# Altium PCB PCB1.PcbDoc (part 8 of 12)
Units mm, origin at the board's own origin, x right, y up, seen from the top; angles counter-clockwise.
Board outline 100 x 100 mm, 6 copper layers (Top Layer, Int1 (GND), Int2 (Sign), Int3 (Sign), Int4 (PWR), Bottom Layer), stack 1.538 mm thick; 614 components, 712 nets, 3014 pads, 1096 vias.
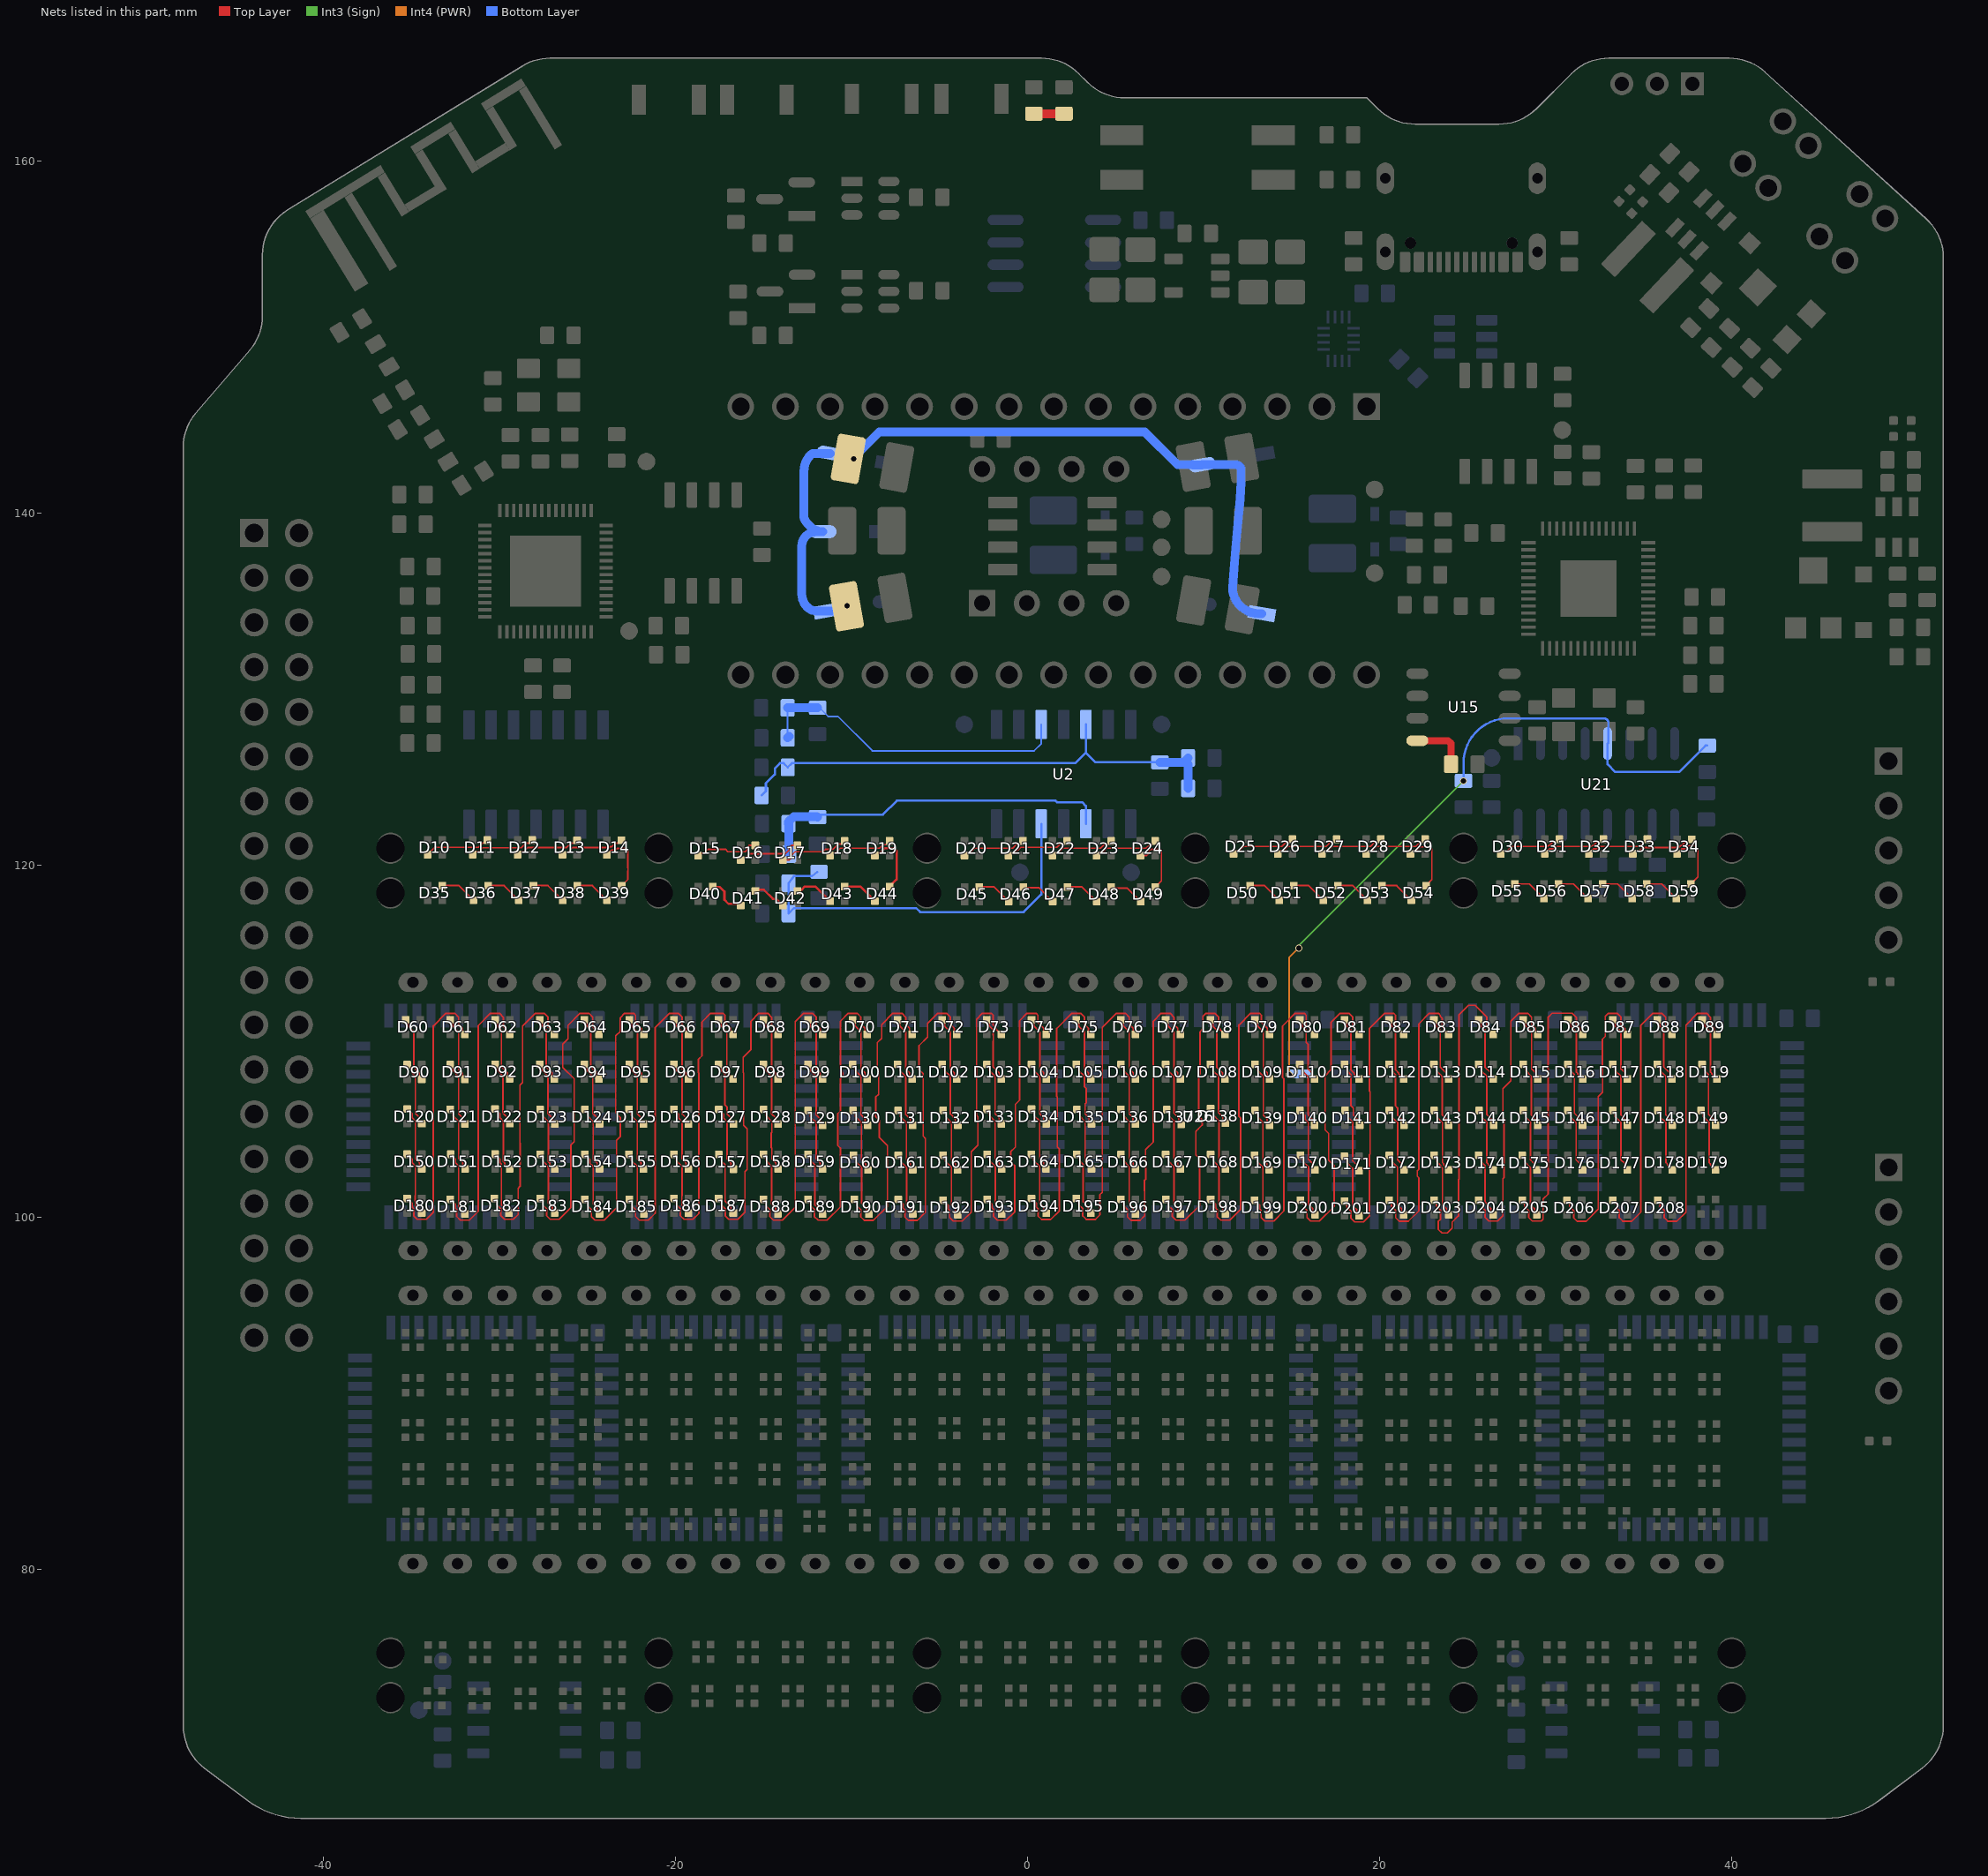
[diagram p11: the nets of this part, all layers, seen from the top]

## Via types
v1: diameter 0.4, hole 0.3, Top Layer to Bottom Layer, tented both sides, 1087 vias
v2: diameter 0.4, hole 0.3, Top Layer to Bottom Layer, 6 vias
v3: diameter 0.4, hole 0.3, Top Layer to Bottom Layer, tented top, 2 vias
v4: diameter 0.6, hole 0.5, Top Layer to Bottom Layer, 1 vias

## Nets (pads, with @x,y where several pads share a name; then routed paths per layer and width w, separated by ;. In a path a pad name is that pad's centre, name@x,y a point inside that pad or via, vN(x,y) a via of type N, cw(c..) or ccw(c..) an arc to the next point about the centre after c; other vN are vias at no path point) (continued)
NetC17_2: C17.2 U15.8 | length 3.2
  Top Layer w0.4: U15.8@22.133,127.087 23.882,127.087 24.045,126.924 C17.2@24.045,125.745
NetC19_2: C19.2 D4.2 D5.1 | length 35.4
  Bottom Layer w0.5: v1(-9.885,143.088) v1@-9.84,143.181 ; 11.805,138.004 12.074,140.825 ; D5.1@13.305,134.308 D5.1@13.121,134.308 ; v1@-9.84,143.181 cw(c-9.39,142.963) -9.744,143.316 ; v1@-9.84,143.181 cw(c-9.39,142.963) -9.744,143.316 ; -9.744,143.316 -8.43,144.63 6.645,144.63 8.508,142.767 9.368,142.767 9.392,142.743 9.881,142.743 D4.2@9.906,142.767 11.805,142.767 cw(c11.805,142.446) 12.126,142.446 12.126,141.759 12.076,140.845 12.075,140.844 ; 11.631,135.798 ccw(c13.121,135.798) D5.1@13.121,134.308 ; 11.631,135.798 ccw(c13.121,135.798) D5.1@13.121,134.308 ; 11.631,135.798 11.685,136.501 11.805,137.997 ; 11.805,137.997 cw(c12.303,137.956) 11.805,138.003 ccw(c12.303,137.956) 11.805,137.997 ; 12.074,140.825 ccw(c11.576,140.872) 12.075,140.844 ; 12.074,140.825 ccw(c11.576,140.872) 12.075,140.844
NetC24_1: C24.1 D6.2 D7.1 D8.2 | length 19.2
  Top Layer w0.5: v1(-10.279,134.745) ccw(c-10.308,134.775) C24.1@-10.267,134.775
  Bottom Layer w0.5: D8.2@-11.229,143.408 -12.13,143.408 ; v1(-10.279,134.745) v1@-10.303,134.722 ; -12.84,135.43 ccw(c-11.765,135.43) -12.525,134.67 ; -12.84,135.43 ccw(c-11.765,135.43) -12.525,134.67 ; -12.84,135.43 -12.84,138.162 ; -12.84,138.162 cw(c-12.072,138.162) -12.615,138.705 ; -12.84,138.162 cw(c-12.072,138.162) -12.615,138.705 ; -12.72,139.898 ccw(c-12.054,139.898) -12.525,139.427 ; -12.72,139.898 ccw(c-12.054,139.898) -12.525,139.427 ; -12.72,139.898 -12.72,142.383 ; -12.72,142.383 cw(c-11.388,142.383) -12.33,143.325 ; -12.72,142.383 cw(c-11.388,142.383) -12.33,143.325 ; -12.615,138.705 cw(c-12.005,138.095) D6.2@-12.005,138.958 ; -12.615,138.705 cw(c-12.005,138.095) D6.2@-12.005,138.958 ; -12.525,134.67 ccw(c-12.013,135.182) -12.013,134.458 D7.1@-11.395,134.458 D7.1@-10.94,134.458 ; -12.525,139.427 -12.345,139.247 ; -12.345,139.247 ccw(c-11.646,139.946) D6.2@-11.646,138.958 ; -12.345,139.247 ccw(c-11.646,139.946) -11.648,138.958 ccw(c-11.646,139.946) D6.2@-11.646,138.958 ; -12.33,143.325 cw(c-12.13,143.125) -12.13,143.408 ; -12.33,143.325 cw(c-12.13,143.125) -12.13,143.408 ; D6.2@-12.005,138.958 D6.2@-11.646,138.958 ; D7.1@-10.94,134.458 ccw(c-10.94,135.358) v1@-10.303,134.722 ; D7.1@-10.94,134.458 ccw(c-10.94,135.358) v1@-10.303,134.722
NetC44_2: C44.2 R14.2 R15.2 U2.3 | length 18.5
  Bottom Layer w0.09: R14.2@-13.649,128.95 -13.645,128.946 -13.645,127.249 R15.2@-13.64,127.244 ; C44.2@-11.941,128.958 -11.841,128.958 -11.341,128.458 -10.783,128.458 -8.835,126.51 0.36,126.51 0.765,126.915 U2.3@0.765,128.008
  Bottom Layer w0.5: R14.2@-13.649,128.95 -13.645,128.954 -11.945,128.954 C44.2@-11.941,128.958 ; R15.2@-13.64,127.244 R15.2@-13.545,127.339
NetC47_2: C47.2 R22.2 R23.2 U2.10 | length 20.4
  Bottom Layer w0.127: C47.2@-11.942,122.747 -11.805,122.884 -8.234,122.884 -7.436,123.682 1.57,123.682 1.664,123.588 3.09,123.588 3.305,123.373 U2.10@3.305,122.358
  Bottom Layer w0.5: R23.2@-13.547,120.644 -13.57,120.668 -13.57,122.353 R22.2@-13.594,122.376 -13.594,122.476 -13.301,122.768 -11.964,122.768 C47.2@-11.942,122.747
NetC49_2: C49.2 R24.2 R25.2 U2.12 | length 22.7
  Bottom Layer w0.127: C49.2@-11.959,119.634 -12.259,119.387 -13.291,119.387 -13.544,119.049 R24.2@-13.591,118.987 R25.2@-13.591,117.258 -13.291,117.566 -6.333,117.566 -6.112,117.345 -0.238,117.345 0.765,118.348 U2.12@0.765,122.358
NetC51_2: C51.2 R32.1 U21.5 U26.3 | length 44.9
  Int3 (Sign) w0.09: v1(15.39,115.302) 15.39,115.44 v1(24.758,124.808)
  Int4 (PWR) w0.09: v1(14.839,108.11) 14.845,108.116 14.845,114.757 v1(15.39,115.302)
  Bottom Layer w0.127: v1(24.758,124.808) 24.758,125.817 ; R32.1@38.605,126.808 38.505,126.808 37.005,125.308 33.377,125.308 32.94,125.745 U21.5@32.94,126.924 ccw(c32.94,126.977) 32.992,126.977 32.992,128.086 ; 24.758,125.817 cw(c27.298,125.817) 27.298,128.357 ; 24.758,125.817 cw(c27.298,125.817) 27.298,128.357 ; 27.298,128.357 32.722,128.357 ; 32.722,128.357 cw(c32.722,128.086) 32.992,128.086 ; 32.722,128.357 cw(c32.722,128.086) 32.992,128.086
NetC52_2: C52.2 R29.1 R30.1 R33.2 R34.2 U2.5 | length 29.3
  Bottom Layer w0.127: R34.2@-15.122,123.974 -14.879,124.217 -14.879,124.664 -14.374,125.169 -14.374,125.51 -14.081,125.803 -13.868,125.803 R33.2@-13.639,125.574 -13.41,125.803 2.698,125.803 3.305,126.41 ; U2.5@3.305,128.008 3.305,126.41 ; C52.2@7.503,125.858 3.856,125.858 3.305,126.41
  Bottom Layer w0.5: C52.2@7.503,125.858 8.955,125.858 8.955,125.958 R30.1@9.105,126.108 ; R29.1@9.105,124.38 R30.1@9.105,125.758
NetD1_A: D1.A R1.2 | length 1.7
  Top Layer w0.5: D1.A@0.348,162.708 R1.2@2.055,162.708
NetD10_1: D10.1 D11.4 | length 3.7
  Top Layer w0.09: D10.1@-34.1,120.611 -33.685,121.026 -31.214,121.026 -30.964,121.276 -30.805,121.276 D11.4@-30.729,121.351
NetD11_1: D11.1 D12.4 | length 3.6
  Top Layer w0.09: D11.1@-31.537,120.611 -31.367,120.781 -31.19,120.781 -30.974,120.997 -28.778,120.997 -28.504,121.271 -28.254,121.271 D12.4@-28.195,121.331
NetD12_1: D12.1 D13.4 | length 3.6
  Top Layer w0.09: D12.1@-28.987,120.611 -28.817,120.781 -28.64,120.781 -28.401,121.021 -26.194,121.021 -25.954,121.26 -25.756,121.26 D13.4@-25.663,121.353
NetD13_1: D13.1 D14.4 | length 3.6
  Top Layer w0.09: D13.1@-26.437,120.6 -26.285,120.752 -26.134,120.752 -25.871,121.015 -23.77,121.015 -23.715,121.07 -23.627,121.07 -23.437,121.26 -23.215,121.26 D14.4@-23.176,121.299
NetD14_1: D14.1 D39.4 | length 3.5
  Top Layer w0.09: D14.1@-23.917,120.6 -23.637,120.88 -23.423,120.88 -23.343,120.96 -22.83,120.96 -22.725,120.855 -22.725,119.855 cw(c-23.088,119.771) -22.725,119.688 -22.725,119.202 D39.4@-23.076,118.851
NetD15_1: D15.1 D16.4 | length 3.7
  Top Layer w0.09: D15.1@-18.737,120.561 -18.6,120.699 -18.386,120.699 -18.164,120.921 -17.179,120.921 -17.037,120.779 -16.053,120.779 -15.941,120.891 -15.941,121.027 -15.829,121.139 D16.4@-15.479,121.139
NetD16_1: D16.1 D17.4 | length 3.7
  Top Layer w0.09: D16.1@-16.309,120.309 -16.139,120.479 -15.981,120.479 -15.791,120.669 -13.763,120.669 -13.541,120.891 -13.541,121.027 -13.429,121.139 D17.4@-13.079,121.139
NetD17_1: D17.1 D18.4 | length 4
  Top Layer w0.09: D17.1@-13.909,120.309 -13.559,120.309 -13.447,120.421 -13.447,120.557 -13.225,120.779 -11.635,120.779 -11.494,120.921 -11.054,120.921 -10.754,121.221 -10.557,121.221 D18.4@-10.445,121.333
NetD18_1: D18.1 D19.4 | length 3.7
  Top Layer w0.09: D18.1@-11.237,120.561 -11.067,120.731 -10.89,120.731 -10.645,120.976 -8.416,120.976 -8.218,121.174 -8.074,121.174 -7.935,121.313 D19.4@-7.851,121.313
NetD19_1: D19.1 D44.4 | length 3.7
  Top Layer w0.127: D19.1@-8.687,120.561 -8.536,120.712 -8.385,120.712 -8.132,120.965 -7.709,120.965 -7.583,120.965 -7.453,120.835 -7.453,120.709 -7.453,119.205 D44.4@-7.857,118.801
NetD20_1: D20.1 D21.4 | length 3.6
  Top Layer w0.09: D20.1@-3.597,120.561 -3.427,120.731 -3.25,120.731 -3.005,120.976 -0.859,120.976 -0.614,121.221 -0.373,121.221 D21.4@-0.325,121.269
NetD21_1: D21.1 D22.4 | length 3.5
  Top Layer w0.09: D21.1@-1.097,120.561 -0.96,120.699 -0.746,120.699 -0.414,121.031 1.662,121.031 1.884,121.253 2.119,121.253 D22.4@2.132,121.266
NetD22_1: D22.1 D23.4 | length 3.5
  Top Layer w0.09: D22.1@1.406,120.561 1.576,120.731 1.753,120.731 1.998,120.976 4.141,120.976 4.386,121.221 4.572,121.221 D23.4@4.649,121.298
NetD23_1: D23.1 D24.4 | length 3.5
  Top Layer w0.09: D23.1@3.903,120.561 4.073,120.731 4.25,120.731 4.495,120.976 6.726,120.976 6.887,121.137 6.979,121.137 7.14,121.298 D24.4@7.143,121.298
NetD24_1: D24.1 D49.4 | length 3.6
  Top Layer w0.09: D24.1@6.403,120.561 6.753,120.561 6.865,120.673 6.865,120.809 6.976,120.921 7.489,120.921 7.593,120.817 7.593,119.126 D49.4@7.246,118.779
NetD25_1: D25.1 D26.4 | length 3.5
  Top Layer w0.09: D25.1@11.693,120.661 11.863,120.831 12.04,120.831 12.285,121.076 14.443,121.076 14.688,121.321 14.865,121.321 14.894,121.35 D26.4@14.894,121.368
NetD26_1: D26.1 D27.4 | length 3.5
  Top Layer w0.09: D26.1@14.205,120.661 14.375,120.831 14.552,120.831 14.797,121.076 16.956,121.076 17.201,121.321 17.378,121.321 17.391,121.334 D27.4@17.391,121.35
NetD27_1: D27.1 D28.4 | length 3.5
  Top Layer w0.09: D27.1@16.718,120.661 16.888,120.831 17.065,120.831 17.31,121.076 19.468,121.076 19.713,121.321 19.89,121.321 19.951,121.382 D28.4@19.951,121.386
NetD28_1: D28.1 D29.4 | length 3.5
  Top Layer w0.09: D28.1@19.23,120.661 19.4,120.831 19.577,120.831 19.822,121.076 22.066,121.076 22.316,121.326 22.403,121.326 22.432,121.355 D29.4@22.432,121.357
NetD29_1: D29.1 D54.4 | length 3.6
  Top Layer w0.09: D29.1@21.743,120.661 21.913,120.831 22.09,120.831 22.306,121.047 22.84,121.047 22.959,120.928 22.959,119.187 D54.4@22.623,118.851
NetD30_1: D30.1 D31.4 | length 3.7
  Top Layer w0.09: D30.1@26.875,120.661 27.014,120.799 27.225,120.799 27.505,121.079 29.524,121.079 29.577,121.131 29.631,121.131 29.854,121.353 30.068,121.353 D31.4@30.205,121.491
NetD31_1: D31.1 D32.4 | length 3.5
  Top Layer w0.09: D31.1@29.375,120.661 29.655,120.941 29.869,120.941 30.004,121.076 32.022,121.076 32.077,121.131 32.132,121.131 32.354,121.353 32.535,121.353 32.59,121.407 D32.4@32.59,121.426
NetD32_1: D32.1 D33.4 | length 3.6
  Top Layer w0.09: D32.1@31.875,120.661 32.155,120.941 32.369,120.941 32.504,121.076 34.735,121.076 34.87,121.211 34.925,121.211 35.111,121.397 D33.4@35.111,121.41
NetD33_1: D33.1 D34.4 | length 3.7
  Top Layer w0.09: D33.1@34.375,120.661 34.535,120.821 34.725,120.821 34.79,120.886 34.814,120.886 34.949,121.021 36.986,121.021 37.088,121.123 37.142,121.123 37.365,121.345 37.578,121.345 D34.4@37.716,121.483
NetD34_1: D34.1 D59.4 | length 3.6
  Top Layer w0.09: D34.1@36.886,120.653 37.166,120.933 37.38,120.933 37.57,121.123 37.862,121.123 38.076,120.909 38.076,119.346 D59.4@37.68,118.95
NetD35_3: D35.4 D36.1 | length 2.1
  Top Layer w0.09: D35.4@-33.27,118.851 -32.321,118.851 D36.1@-31.495,118.025
NetD36_3: D36.4 D37.1 | length 2.1
  Top Layer w0.09: D36.4@-30.665,118.855 -29.749,118.855 D37.1@-28.919,118.025
NetD37_3: D37.4 D38.1 | length 2
  Top Layer w0.09: D37.4@-28.089,118.855 -27.261,118.855 D38.1@-26.426,118.021
NetD38_3: D38.4 D39.1 | length 2
  Top Layer w0.09: D38.4@-25.596,118.851 -24.736,118.851 D39.1@-23.906,118.021
NetD40_3: D40.4 D41.1 | length 2.3
  Top Layer w0.127: D40.4@-17.907,118.801 -17.887,118.781 -17.502,118.781 -17.235,118.514 -17.235,118.051 -17.003,117.819 -16.409,117.819 D41.1@-16.309,117.719
NetD41_3: D41.4 D42.1 | length 2
  Top Layer w0.127: D41.4@-15.479,118.549 -15.414,118.615 -14.993,118.615 -14.481,118.102 -14.293,118.102 D42.1@-13.909,117.719
NetD42_3: D42.4 D43.1 | length 2.3
  Top Layer w0.127: D42.4@-13.079,118.549 -13.014,118.615 -12.855,118.615 -12.669,118.801 -12.067,118.801 D43.1@-11.237,117.971
NetD43_3: D43.4 D44.1 | length 2.1
  Top Layer w0.127: D43.4@-10.407,118.801 -9.517,118.801 D44.1@-8.687,117.971
NetD45_3: D45.4 D46.1 | length 2
  Top Layer w0.09: D45.4@-2.754,118.779 -1.914,118.779 D46.1@-1.084,117.949
NetD46_3: D46.4 D47.1 | length 2
  Top Layer w0.09: D46.4@-0.254,118.779 -0.216,118.74 0.624,118.74 D47.1@1.416,117.949
NetD47_3: D47.4 D48.1 | length 2
  Top Layer w0.09: D47.4@2.246,118.779 3.086,118.779 D48.1@3.916,117.949
NetD48_3: D48.4 D49.1 | length 2
  Top Layer w0.09: D48.4@4.746,118.779 4.821,118.703 5.661,118.703 D49.1@6.416,117.949
NetD50_3: D50.4 D51.1 | length 2
  Top Layer w0.09: D50.4@12.623,118.851 13.463,118.851 D51.1@14.293,118.021
NetD51_3: D51.4 D52.1 | length 2
  Top Layer w0.09: D51.4@15.123,118.851 15.963,118.851 D52.1@16.793,118.021
NetD52_3: D52.4 D53.1 | length 2
  Top Layer w0.09: D52.4@17.623,118.851 18.463,118.851 D53.1@19.293,118.021
NetD53_3: D53.4 D54.1 | length 2
  Top Layer w0.09: D53.4@20.123,118.851 20.963,118.851 D54.1@21.793,118.021
NetD55_3: D55.4 D56.1 | length 2
  Top Layer w0.09: D55.4@27.663,118.95 28.495,118.95 D56.1@29.325,118.12
NetD56_3: D56.4 D57.1 | length 2
  Top Layer w0.09: D56.4@30.155,118.95 31.008,118.95 D57.1@31.838,118.12
NetD57_3: D57.4 D58.1 | length 2
  Top Layer w0.09: D57.4@32.668,118.95 33.513,118.95 D58.1@34.343,118.12
NetD58_3: D58.4 D59.1 | length 2
  Top Layer w0.09: D58.4@35.173,118.95 36.02,118.95 D59.1@36.85,118.12
NetD60_1: D60.1 D90.4 | length 3.8
  Top Layer w0.09: D60.1@-35.347,111.231 -35.21,111.093 -35.21,110.879 -34.877,110.547 -34.877,108.569 -34.79,108.482 -34.79,108.427 -34.568,108.204 -34.568,107.991 D90.4@-34.43,107.853
NetD61_1: D61.1 D91.4 | length 3.7
  Top Layer w0.09: D61.1@-32.807,111.231 -32.67,111.093 -32.67,110.879 -32.34,110.55 -32.34,108.427 -32.118,108.204 -32.118,107.991 D91.4@-31.98,107.853
NetD61_3: D61.4 D180.1 | length 15.8
  Top Layer w0.09: D180.1@-35.26,101.083 -34.98,100.803 -34.98,100.589 -34.9,100.509 -34.9,100.454 -34.888,100.442 -34.888,100.095 -34.687,99.893 -34.174,99.893 -33.774,100.293 -33.774,110.88 -33.064,111.591 -32.551,111.591 -32.337,111.377 -32.337,110.975 -32.115,110.752 -32.115,110.571 -32.104,110.56 D61.4@-32.083,110.56
NetD62_1: D62.1 D92.4 | length 3.7
  Top Layer w0.09: D62.1@-30.267,111.231 -30.13,111.093 -30.13,110.879 -29.907,110.657 -29.907,108.557 -29.575,108.225 -29.575,108.011 D92.4@-29.437,107.874
NetD62_3: D62.4 D181.1 | length 16.1
  Top Layer w0.09: D181.1@-32.81,101.033 -32.53,100.753 -32.53,100.539 -32.45,100.459 -32.45,100.057 -32.237,99.843 -31.724,99.843 -31.221,100.346 -31.221,110.893 -30.524,111.591 -30.011,111.591 -29.797,111.377 -29.797,110.816 -29.717,110.736 -29.717,110.681 D62.4@-29.437,110.401
NetD63_1: D63.1 D93.4 | length 3.7
  Top Layer w0.09: D63.1@-27.727,111.231 -27.59,111.093 -27.59,110.879 -27.367,110.657 -27.367,108.557 -27.035,108.225 -27.035,108.018 D93.4@-26.88,107.864
NetD63_3: D63.4 D182.1 | length 16.1
  Top Layer w0.09: D182.1@-30.31,101.08 -30.172,100.942 -30.172,100.728 -29.95,100.506 -29.95,100.451 -29.938,100.439 -29.938,100.092 -29.736,99.89 -29.224,99.89 -28.956,100.158 -28.956,101.657 -28.848,101.765 -28.848,104.229 -28.854,104.234 -28.854,106.698 -28.852,106.7 -28.852,107.522 -28.703,107.67 -28.703,110.871 -27.984,111.591 -27.471,111.591 -27.257,111.377 -27.257,110.816 -27.177,110.736 -27.177,110.681 D63.4@-26.897,110.401
NetD64_1: D64.1 D94.4 | length 3.7
  Top Layer w0.09: D64.1@-25.16,111.221 -25.05,111.11 -25.05,110.879 -24.827,110.657 -24.827,108.545 -24.495,108.212 -24.495,107.999 D94.4@-24.36,107.864
NetD64_3: D64.4 D183.1 | length 16.6
  Top Layer w0.09: D183.1@-27.708,101.08 -27.573,100.945 -27.573,100.731 -27.338,100.497 -27.338,100.095 -27.137,99.893 -26.624,99.893 -25.954,100.563 -25.954,104.131 -25.776,104.309 -25.776,107.877 -26.423,108.524 -26.423,109.844 -26.122,110.145 -26.122,110.912 -25.444,111.591 -24.931,111.591 -24.717,111.377 -24.717,110.816 -24.637,110.736 -24.637,110.681 D64.4@-24.357,110.401
NetD65_1: D65.1 D95.4 | length 3.7
  Top Layer w0.09: D65.1@-22.598,111.181 -22.51,111.093 -22.51,110.879 -22.177,110.547 -22.177,108.435 -21.955,108.212 -21.955,107.959 D95.4@-21.82,107.824
NetD65_3: D65.4 D184.1 | length 16.4
  Top Layer w0.09: D184.1@-25.129,101.033 -25.023,100.926 -25.023,100.681 -24.788,100.447 -24.788,100.045 -24.587,99.843 -24.074,99.843 -23.362,100.555 -23.362,104.373 -23.154,104.581 -23.154,105.69 -23.418,105.953 -23.418,110.314 -23.148,110.584 -23.148,111.346 -22.904,111.591 -22.391,111.591 -22.287,111.487 -22.287,111.085 -21.955,110.752 -21.955,110.53 D65.4@-21.779,110.354
NetD66_1: D66.1 D96.4 | length 3.7
  Top Layer w0.09: D66.1@-20.082,111.206 -19.97,111.093 -19.97,110.879 -19.637,110.547 -19.637,108.435 -19.415,108.212 -19.415,107.987 D96.4@-19.277,107.849
NetD66_3: D66.4 D185.1 | length 16.2
  Top Layer w0.09: D185.1@-22.616,101.033 -22.51,100.926 -22.51,100.681 -22.287,100.459 -22.287,100.057 -22.074,99.843 -21.561,99.843 -21.171,100.234 -21.171,109.481 -21.177,109.487 -21.177,110.778 -20.364,111.591 -19.851,111.591 -19.637,111.377 -19.637,110.975 -19.415,110.752 -19.415,110.503 D66.4@-19.266,110.354
NetD67_1: D67.1 D97.4 | length 3.7
  Top Layer w0.09: D67.1@-17.542,111.206 -17.43,111.093 -17.43,110.879 -17.097,110.547 -17.097,108.276 -17.017,108.196 -17.017,108.141 D97.4@-16.727,107.851
NetD67_3: D67.4 D186.1 | length 16.2
  Top Layer w0.09: D186.1@-20.076,101.083 -19.97,100.976 -19.97,100.731 -19.747,100.509 -19.747,100.107 -19.534,99.893 -19.021,99.893 -18.69,100.224 -18.69,108.218 -18.708,108.236 -18.708,108.987 -18.513,109.182 -18.513,111.103 -18.026,111.591 -17.311,111.591 -17.207,111.487 -17.207,111.085 -16.875,110.752 -16.875,110.553 D67.4@-16.726,110.404
NetD68_1: D68.1 D98.4 | length 3.7
  Top Layer w0.09: D68.1@-15.012,111.215 -14.89,111.093 -14.89,110.879 -14.557,110.547 -14.557,108.435 -14.335,108.212 -14.335,108.015 D98.4@-14.182,107.862
NetD68_3: D68.4 D187.1 | length 16.3
  Top Layer w0.09: D187.1@-17.532,101.082 -17.425,100.975 -17.425,100.73 -17.191,100.496 -17.191,100.093 -16.989,99.892 -16.477,99.892 -16.074,100.294 -16.074,102.6 -15.945,102.73 -15.945,105.036 -16.143,105.235 -16.143,108.204 -16.168,108.229 -16.168,109.094 -15.726,109.536 -15.726,111.148 -15.284,111.591 -14.771,111.591 -14.557,111.377 -14.557,110.975 -14.335,110.752 -14.335,110.556 D68.4@-14.182,110.402
NetD69_1: D69.1 D99.4 | length 3.7
  Top Layer w0.09: D69.1@-12.479,111.222 -12.35,111.093 -12.35,110.879 -12.017,110.547 -12.017,108.435 -11.795,108.212 -11.795,108.003 D99.4@-11.657,107.865
NetD69_3: D69.4 D188.1 | length 16.2
  Top Layer w0.09: D188.1@-14.996,101.033 -14.89,100.926 -14.89,100.681 -14.655,100.447 -14.655,100.045 -14.454,99.843 -13.941,99.843 -13.208,100.576 -13.208,111.126 -12.744,111.591 -12.231,111.591 -12.017,111.377 -12.017,110.975 -11.795,110.752 -11.795,110.503 D69.4@-11.646,110.354
NetD70_1: D70.1 D100.4 | length 3.7
  Top Layer w0.09: D70.1@-9.887,111.171 -9.81,111.093 -9.81,110.879 -9.477,110.547 -9.477,108.435 -9.255,108.212 -9.255,107.99 D100.4@-9.08,107.816
NetD70_3: D70.4 D189.1 | length 16.4
  Top Layer w0.09: D189.1@-12.456,101.032 -12.35,100.926 -12.35,100.68 -12.127,100.458 -12.127,100.056 -11.914,99.842 -11.401,99.842 -10.641,100.602 -10.641,103.941 -10.792,104.091 -10.792,105.897 -10.641,106.047 -10.641,107.852 cw(c-10.551,107.852) -10.617,107.913 ccw(c-10.891,108.166) -10.618,108.419 cw(c-10.551,108.479) -10.641,108.479 -10.641,111.153 -10.204,111.591 -9.691,111.591 -9.489,111.389 -9.489,110.987 -9.255,110.752 -9.255,110.502 D70.4@-9.106,110.353
NetD71_1: D71.1 D101.4 | length 3.7
  Top Layer w0.09: D71.1@-7.36,111.171 -7.27,111.08 -7.27,110.879 -6.937,110.547 -6.937,108.435 -6.715,108.212 -6.715,108 D101.4@-6.53,107.816
NetD71_3: D71.4 D190.1 | length 16.8
  Top Layer w0.09: D190.1@-9.829,101.023 -9.723,100.916 -9.723,100.671 -9.488,100.437 -9.488,100.035 -9.287,99.833 -8.774,99.833 -7.975,100.632 -7.975,104.072 -8.431,104.528 -8.431,105.518 -8.644,105.731 -8.644,106.83 -8.477,106.997 -8.477,108.429 -8.548,108.5 -8.548,109.932 -8.304,110.177 -8.304,110.951 -7.664,111.591 -7.151,111.591 -6.937,111.377 -6.937,110.975 -6.715,110.752 -6.715,110.571 D71.4@-6.488,110.344
NetD72_1: D72.1 D102.4 | length 3.7
  Top Layer w0.09: D72.1@-4.81,111.171 -4.73,111.09 -4.73,110.879 -4.397,110.547 -4.397,108.435 -4.175,108.212 -4.175,108.01 D102.4@-3.98,107.816
NetD72_3: D72.4 D191.1 | length 16.5
  Top Layer w0.09: D191.1@-7.329,100.992 -7.08,100.743 -7.08,100.529 -6.988,100.437 -6.988,100.035 -6.787,99.833 -6.274,99.833 -5.818,100.289 -5.818,104.489 -5.948,104.618 -5.948,108.168 -6.182,108.402 -6.182,109.759 -5.696,110.244 -5.696,111.018 -5.124,111.591 -4.611,111.591 -4.397,111.377 -4.397,110.975 -4.175,110.752 -4.175,110.54 D72.4@-3.979,110.344
NetD73_1: D73.1 D103.4 | length 3.7
  Top Layer w0.09: D73.1@-2.31,111.211 -2.19,111.09 -2.19,110.879 -1.967,110.657 -1.967,110.348 -1.955,110.336 -1.955,110.027 -1.967,110.015 -1.967,108.545 -1.635,108.212 -1.635,108.01 D103.4@-1.48,107.856
NetD73_3: D73.4 D192.1 | length 16.3
  Top Layer w0.09: D192.1@-4.779,100.952 -4.53,100.703 -4.53,100.489 -4.438,100.397 -4.438,99.995 -4.237,99.793 -3.724,99.793 -3.213,100.304 -3.213,103.728 -2.836,104.106 -2.836,105.722 -2.914,105.801 -2.914,111.26 -2.584,111.591 -2.071,111.591 -1.967,111.487 -1.967,110.926 -1.777,110.736 -1.777,110.681 D73.4@-1.429,110.332
NetD74_1: D74.1 D104.4 | length 3.7
  Top Layer w0.09: D74.1@0.2,111.228 0.35,111.078 0.35,110.879 0.683,110.547 0.683,108.435 0.905,108.212 0.905,107.997 D104.4@1.03,107.871
NetD74_3: D74.4 D193.1 | length 16.4
  Top Layer w0.09: D193.1@-2.31,101.033 -2.03,100.753 -2.03,100.539 -1.938,100.447 -1.938,100.045 -1.736,99.843 -1.224,99.843 -0.739,100.328 -0.739,102.938 -0.893,103.092 ; -0.893,103.093 -0.972,103.172 -0.972,103.723 -0.701,103.994 -0.701,106.425 -0.465,106.662 -0.465,111.17 -0.044,111.591 0.469,111.591 0.573,111.487 0.573,111.085 0.905,110.752 0.905,110.539 D74.4@1.071,110.372
NetD75_1: D75.1 D105.4 | length 3.7
  Top Layer w0.09: D75.1@2.79,111.221 2.89,111.12 2.89,110.879 3.223,110.547 3.223,108.435 3.445,108.212 3.445,108.031 3.612,107.864 D105.4@3.62,107.864
NetD75_3: D75.4 D194.1 | length 16.2
  Top Layer w0.09: D194.1@0.244,101.042 0.493,100.793 0.493,100.579 0.585,100.487 0.585,100.085 0.786,99.883 1.299,99.883 1.797,100.381 1.797,103.891 1.68,104.008 1.68,106.837 1.638,106.879 1.638,110.733 2.496,111.591 3.009,111.591 3.223,111.377 3.223,110.975 3.445,110.752 3.445,110.543 D75.4@3.594,110.394
NetD76_1: D76.1 D106.4 | length 3.7
  Top Layer w0.09: D76.1@5.29,111.211 5.43,111.07 5.43,110.879 5.763,110.547 5.763,108.435 5.985,108.212 5.985,107.99 D106.4@6.12,107.856
NetD76_3: D76.4 D195.1 | length 16.1
  Top Layer w0.09: D195.1@2.784,101.042 2.89,100.935 2.89,100.721 3.125,100.487 3.125,100.085 3.326,99.883 3.839,99.883 4.098,100.142 4.098,101.293 4.237,101.432 4.237,110.791 5.036,111.591 5.549,111.591 5.763,111.377 5.763,110.975 5.985,110.752 5.985,110.543 D76.4@6.134,110.394
NetD77_1: D77.1 D107.4 | length 3.7
  Top Layer w0.09: D77.1@7.833,111.211 7.97,111.073 7.97,110.879 8.303,110.547 8.303,108.435 8.525,108.212 8.525,107.999 D107.4@8.663,107.861
NetD77_3: D77.4 D196.1 | length 16.2
  Top Layer w0.09: D196.1@5.324,100.992 5.43,100.885 5.43,100.671 5.665,100.437 5.665,100.035 5.866,99.833 6.379,99.833 6.636,100.09 6.636,101.519 6.623,101.533 6.623,102.098 6.707,102.182 6.707,103.093 6.692,103.108 6.692,103.85 7.134,104.292 7.134,111.148 7.576,111.591 8.089,111.591 8.303,111.377 8.303,110.975 8.525,110.752 8.525,110.493 D77.4@8.674,110.344
NetD78_1: D78.1 D108.4 | length 3.7
  Top Layer w0.09: D78.1@10.39,111.211 10.51,111.09 10.51,110.879 10.733,110.657 10.733,108.545 11.065,108.212 11.065,108.01 D108.4@11.22,107.856
NetD78_3: D78.4 D197.1 | length 16.4
  Top Layer w0.09: D197.1@7.871,101.002 7.977,100.895 7.977,100.681 8.212,100.447 8.212,100.045 8.413,99.843 8.926,99.843 9.76,100.677 9.76,103.345 9.55,103.556 9.55,104.894 9.684,105.028 9.687,105.028 9.905,105.246 9.905,105.554 9.716,105.743 9.716,108.083 9.786,108.153 9.786,110.552 9.951,110.718 9.951,111.425 10.116,111.591 10.629,111.591 10.843,111.377 10.843,110.816 10.923,110.736 10.923,110.681 D78.4@11.221,110.382
NetD79_1: D79.1 D109.4 | length 3.7
  Top Layer w0.09: D79.1@12.944,111.171 13.05,111.064 13.05,110.879 13.383,110.547 13.383,108.435 13.605,108.212 13.605,107.93 D109.4@13.72,107.816
NetD79_3: D79.4 D198.1 | length 16.2
  Top Layer w0.09: D198.1@10.39,101.033 10.67,100.753 10.67,100.539 10.762,100.447 10.762,100.045 10.964,99.843 11.476,99.843 12.087,100.454 12.087,105.65 11.999,105.738 11.999,110.934 12.656,111.591 13.169,111.591 13.273,111.487 13.273,111.085 13.605,110.752 13.605,110.539 D79.4@13.771,110.372
NetD80_1: D80.1 D110.4 | length 3.7
  Top Layer w0.09: D80.1@15.49,111.171 15.59,111.07 15.59,110.879 15.813,110.657 15.813,109.951 15.923,109.841 15.923,108.435 16.145,108.212 16.145,107.999 D110.4@16.32,107.824
NetD80_3: D80.4 D199.1 | length 16.2
  Top Layer w0.09: D199.1@12.921,100.952 13.17,100.703 13.17,100.489 13.262,100.397 13.262,99.995 13.463,99.793 13.976,99.793 14.551,100.368 14.551,107.872 14.467,107.956 14.467,110.861 15.196,111.591 15.709,111.591 15.813,111.487 15.813,110.926 16.003,110.736 16.003,110.681 D80.4@16.271,110.412
NetD81_1: D81.1 D111.4 | length 3.6
  Top Layer w0.09: D81.1@18.08,111.111 18.13,111.061 18.13,110.879 18.353,110.657 18.353,108.386 18.543,108.196 18.543,108.141 D111.4@18.82,107.864
NetD81_3: D81.4 D200.1 | length 16.6
  Top Layer w0.09: D200.1@15.521,100.952 15.77,100.703 15.77,100.489 15.862,100.397 15.862,99.995 16.063,99.793 16.576,99.793 17.406,100.623 17.406,101.772 17.411,101.777 17.411,102.927 17.091,103.246 17.091,104.771 16.889,104.973 16.889,108.045 17.227,108.383 17.227,111.081 17.736,111.591 18.249,111.591 18.463,111.377 18.463,110.816 18.543,110.736 18.543,110.681 D81.4@18.871,110.352
NetD82_1: D82.1 D112.4 | length 3.7
  Top Layer w0.09: D82.1@20.56,111.171 20.67,111.061 20.67,110.879 20.893,110.657 20.893,108.386 21.083,108.196 21.083,108.141 D112.4@21.37,107.854
NetD82_3: D82.4 D201.1 | length 16.2
  Top Layer w0.09: D201.1@18.024,100.902 18.13,100.795 18.13,100.581 18.365,100.347 18.365,99.945 18.566,99.743 19.079,99.743 19.407,100.071 19.407,103.556 19.447,103.597 19.447,107.142 19.41,107.179 19.41,110.724 20.276,111.591 20.789,111.591 20.893,111.487 20.893,110.926 21.083,110.736 21.083,110.681 D82.4@21.374,110.389
NetD83_1: D83.1 D113.4 | length 3.7
  Top Layer w0.09: D83.1@23.1,111.171 23.21,111.061 23.21,110.879 23.433,110.657 23.433,108.545 23.765,108.212 23.765,107.97 D113.4@23.92,107.816
NetD83_3: D83.4 D202.1 | length 16.2
  Top Layer w0.09: D202.1@20.564,100.942 20.67,100.835 20.67,100.621 20.905,100.387 20.905,99.985 21.106,99.783 21.619,99.783 22.218,100.382 22.218,102.254 22.134,102.338 22.134,102.647 22.218,102.73 22.218,110.992 22.816,111.591 23.329,111.591 23.433,111.487 23.433,111.432 23.543,111.322 23.543,110.816 23.623,110.736 23.623,110.681 D83.4@23.903,110.401
NetD84_1: D84.1 D114.4 | length 3.7
  Top Layer w0.09: D84.1@25.65,111.161 25.75,111.061 25.75,110.879 25.973,110.657 25.973,108.545 26.305,108.212 26.305,107.943 D114.4@26.443,107.806
NetD84_3: D84.4 D203.1 | length 18.4
  Top Layer w0.09: D203.1@23.121,100.952 23.227,100.845 23.227,100.631 23.454,100.405 23.454,99.901 23.318,99.765 23.318,99.331 23.536,99.114 23.844,99.114 24.115,99.385 24.115,99.732 24.472,100.089 24.472,102.148 24.507,102.183 24.507,111.524 25.034,112.051 25.409,112.051 26.083,111.377 26.083,110.816 26.163,110.736 26.163,110.681 D84.4@26.471,110.372
NetD85_1: D85.1 D115.4 | length 3.7
  Top Layer w0.09: D85.1@28.19,111.161 28.29,111.061 28.29,110.879 28.623,110.547 28.623,108.435 28.845,108.212 28.845,107.88 D115.4@28.92,107.806
NetD85_3: D85.4 D204.1 | length 16.3
  Top Layer w0.09: D204.1@25.644,100.952 25.893,100.703 25.893,100.489 25.985,100.397 25.985,99.995 26.186,99.793 26.699,99.793 26.996,100.09 26.996,102.209 27.057,102.269 27.057,105.593 26.996,105.654 26.996,107.324 27.446,107.774 27.446,111.141 27.896,111.591 28.409,111.591 28.623,111.377 28.623,110.975 28.845,110.752 28.845,110.453 D85.4@28.994,110.304
NetD86_1: D86.1 D116.4 | length 3.7
  Top Layer w0.09: D86.1@30.69,111.161 30.73,111.161 30.83,111.061 30.83,110.879 31.163,110.547 31.163,108.276 31.243,108.196 31.243,108.141 D116.4@31.52,107.864
NetD86_3: D86.4 D205.1 | length 16.6
  Top Layer w0.09: D205.1@28.121,100.952 28.227,100.845 28.227,100.631 28.462,100.397 28.462,99.995 28.663,99.793 29.176,99.793 29.28,99.897 29.28,99.997 29.28,100.313 29.28,101.048 29.57,101.338 29.57,111.385 29.788,111.603 30.937,111.603 31.163,111.377 31.163,110.975 31.385,110.752 31.385,110.39 D86.4@31.471,110.304
NetD87_1: D87.1 D117.4 | length 3.7
  Top Layer w0.09: D87.1@33.24,111.161 33.27,111.161 33.37,111.061 33.37,110.879 33.703,110.547 33.703,108.435 33.925,108.212 33.925,107.999 D117.4@34.07,107.854
NetD87_3: D87.4 D206.1 | length 16.3
  Top Layer w0.09: D206.1@30.64,100.973 30.777,100.835 30.777,100.621 31.012,100.387 31.012,99.985 31.213,99.783 31.726,99.783 32.407,100.464 32.407,106.859 32.663,107.115 32.663,108.323 32.646,108.341 32.646,110.122 32.811,110.287 32.811,111.425 32.976,111.591 33.489,111.591 33.703,111.377 33.703,110.975 33.925,110.752 33.925,110.39 D87.4@34.021,110.294
NetD88_1: D88.1 D118.4 | length 3.7
  Top Layer w0.09: D88.1@35.8,111.171 35.91,111.061 35.91,110.879 36.133,110.657 36.133,108.545 36.465,108.212 36.465,107.97 D118.4@36.62,107.816
NetD88_3: D88.4 D207.1 | length 16.2
  Top Layer w0.09: D207.1@33.264,100.942 33.513,100.693 33.513,100.479 33.605,100.387 33.605,99.985 33.806,99.783 34.319,99.783 34.827,100.291 34.827,105.03 34.825,105.032 34.825,110.9 35.516,111.591 36.029,111.591 36.243,111.377 36.243,110.816 36.323,110.736 36.323,110.681 D88.4@36.614,110.389
NetD89_1: D89.1 D119.4 | length 3.8
  Top Layer w0.09: D89.1@38.24,111.171 38.34,111.171 38.45,111.061 38.45,110.879 38.783,110.547 38.783,108.276 38.863,108.196 38.863,108.141 39.07,107.934 D119.4@39.07,107.816
NetD89_3: D89.4 D208.1 | length 16.3
  Top Layer w0.09: D208.1@35.821,100.942 35.927,100.835 35.927,100.621 36.162,100.387 36.162,99.985 36.363,99.783 36.876,99.783 37.396,100.303 37.396,110.931 38.056,111.591 38.569,111.591 38.783,111.377 38.783,110.975 39.005,110.752 39.005,110.46 D89.4@39.171,110.294
NetD90_1: D90.1 D120.4 | length 3.5
  Top Layer w0.09: D90.1@-35.26,108.683 -34.98,108.403 -34.98,108.189 -34.79,107.999 -34.79,105.902 -34.568,105.679 -34.568,105.498 -34.538,105.468 D120.4@-34.53,105.468
NetD91_1: D91.1 D121.4 | length 3.7
  Top Layer w0.09: D91.1@-32.81,108.683 -32.673,108.545 -32.673,108.331 -32.34,107.999 -32.34,105.887 -32.118,105.664 -32.118,105.451 D121.4@-31.98,105.313
NetD92_1: D92.1 D122.4 | length 3.7
  Top Layer w0.09: D92.1@-30.267,108.704 -30.13,108.566 -30.13,108.352 -29.823,108.045 -29.823,105.979 -29.801,105.956 -29.801,105.902 -29.578,105.679 -29.578,105.465 D122.4@-29.441,105.328
NetD93_1: D93.1 D123.4 | length 3.7
  Top Layer w0.09: D93.1@-27.71,108.687 -27.59,108.566 -27.59,108.352 -27.257,108.02 -27.257,105.894 -27.018,105.654 -27.018,105.452 D123.4@-26.884,105.318
NetD94_1: D94.1 D124.4 | length 3.7
  Top Layer w0.09: D94.1@-25.16,108.694 -25.05,108.583 -25.05,108.339 -24.717,108.007 -24.717,105.904 -24.468,105.654 -24.468,105.452 D124.4@-24.334,105.318
NetD95_1: D95.1 D125.4 | length 3.7
  Top Layer w0.09: D95.1@-22.61,108.654 -22.51,108.553 -22.51,108.339 -22.19,108.02 -22.19,105.877 -21.968,105.654 -21.968,105.441 D125.4@-21.806,105.278
NetD96_1: D96.1 D126.4 | length 3.7
  Top Layer w0.09: D96.1@-20.095,108.679 -19.97,108.553 -19.97,108.339 -19.64,108.01 -19.64,105.877 -19.418,105.654 -19.418,105.441 D126.4@-19.28,105.303
NetD97_1: D97.1 D127.4 | length 3.7
  Top Layer w0.09: D97.1@-17.557,108.679 -17.43,108.551 -17.43,108.339 -17.207,108.117 -17.207,106.396 -17.09,106.279 -17.09,105.932 -17.09,105.877 -16.868,105.654 -16.868,105.441 D127.4@-16.73,105.303
NetD98_1: D98.1 D128.4 | length 3.7
  Top Layer w0.09: D98.1@-15.012,108.692 -14.89,108.57 -14.89,108.339 -14.557,108.007 -14.557,105.894 -14.318,105.654 -14.318,105.449 D128.4@-14.185,105.316
NetD99_1: D99.1 D129.4 | length 3.7
  Top Layer w0.09: D99.1@-12.487,108.695 -12.35,108.558 -12.35,108.339 -12.017,108.007 -12.017,105.821 -11.791,105.595 -11.791,105.414 -11.697,105.319 D129.4@-11.661,105.319
NetD100_1: D100.1 D130.4 | length 3.7
  Top Layer w0.09: D100.1@-9.9,108.644 -9.81,108.553 -9.81,108.339 -9.477,108.007 -9.477,105.841 -9.232,105.595 -9.232,105.414 -9.086,105.268 D130.4@-9.084,105.268
NetD101_1: D101.1 D131.4 | length 3.7
  Top Layer w0.09: D101.1@-7.36,108.644 -7.27,108.553 -7.27,108.339 -6.937,108.007 -6.937,105.86 -6.673,105.595 -6.673,105.407 D131.4@-6.534,105.268
NetD102_1: D102.1 D132.4 | length 3.7
  Top Layer w0.09: D102.1@-4.81,108.644 -4.73,108.563 -4.73,108.339 -4.397,108.007 -4.397,105.88 -4.113,105.595 -4.113,105.397 D132.4@-3.984,105.268
NetD103_1: D103.1 D133.4 | length 3.7
  Top Layer w0.09: D103.1@-2.31,108.684 -2.19,108.563 -2.19,108.339 -1.857,108.007 -1.857,105.895 -1.635,105.672 -1.635,105.459 D133.4@-1.484,105.308
NetD104_1: D104.1 D134.4 | length 3.7
  Top Layer w0.09: D104.1@0.2,108.701 0.35,108.551 0.35,108.339 0.683,108.007 0.683,105.895 0.905,105.672 0.905,105.448 D134.4@1.027,105.325
NetD105_1: D105.1 D135.4 | length 3.8
  Top Layer w0.09: D105.1@2.79,108.694 2.89,108.593 2.89,108.339 3.223,108.007 3.223,107.421 3.322,107.321 3.322,106.521 3.26,106.458 3.26,105.877 3.482,105.654 3.482,105.452 D135.4@3.616,105.318
NetD106_1: D106.1 D136.4 | length 3.7
  Top Layer w0.09: D106.1@5.3,108.684 5.43,108.553 5.43,108.339 5.76,108.01 5.76,105.877 5.982,105.654 5.982,105.442 D136.4@6.116,105.308
NetD107_1: D107.1 D137.4 | length 3.7
  Top Layer w0.09: D107.1@7.84,108.684 7.97,108.553 7.97,108.339 8.303,108.007 8.303,105.924 8.582,105.644 8.582,105.385 D137.4@8.659,105.308
NetD108_1: D108.1 D138.4 | length 3.7
  Top Layer w0.09: D108.1@10.39,108.684 10.51,108.563 10.51,108.339 10.843,108.007 10.843,105.944 11.082,105.704 11.082,105.442 D138.4@11.216,105.308
NetD109_1: D109.1 D139.4 | length 3.7
  Top Layer w0.09: D109.1@12.96,108.644 13.05,108.553 13.05,108.339 13.381,108.009 13.381,105.817 13.603,105.595 13.603,105.381 D139.4@13.716,105.268
NetD110_1: D110.1 D140.4 | length 3.7
  Top Layer w0.09: D110.1@15.49,108.644 15.59,108.543 15.59,108.339 15.923,108.007 15.923,105.89 15.94,105.872 15.94,105.817 16.163,105.595 16.163,105.414 16.309,105.268 D140.4@16.316,105.268
NetD111_1: D111.1 D141.4 | length 3.7
  Top Layer w0.09: D111.1@18.054,108.584 18.068,108.584 18.13,108.521 18.13,108.339 18.353,108.117 18.353,106.367 18.5,106.22 18.5,105.817 18.722,105.595 18.722,105.302 D141.4@18.816,105.208
NetD112_1: D112.1 D142.4 | length 3.7
  Top Layer w0.09: D112.1@20.54,108.644 20.548,108.644 20.67,108.521 20.67,108.339 20.893,108.117 20.893,106.336 21.009,106.22 21.009,105.817 21.231,105.595 21.231,105.403 D142.4@21.366,105.268
NetD113_1: D113.1 D143.4 | length 3.7
  Top Layer w0.09: D113.1@23.12,108.644 23.21,108.553 23.21,108.339 23.543,108.007 23.543,105.834 23.782,105.594 23.782,105.402 D143.4@23.916,105.268
NetD114_1: D114.1 D144.4 | length 3.7
  Top Layer w0.09: D114.1@25.67,108.634 25.75,108.553 25.75,108.339 26.083,108.007 26.083,105.844 26.332,105.594 26.332,105.365 D144.4@26.439,105.258
NetD115_1: D115.1 D145.4 | length 3.7
  Top Layer w0.09: D115.1@28.191,108.634 28.29,108.534 28.29,108.339 28.61,108.02 28.61,105.817 28.832,105.594 28.832,105.342 D145.4@28.916,105.258
NetD116_1: D116.1 D146.4 | length 3.7
  Top Layer w0.09: D116.1@30.69,108.634 30.718,108.634 30.83,108.521 30.83,108.339 31.053,108.117 31.053,105.924 31.382,105.594 31.382,105.392 D146.4@31.516,105.258
NetD117_1: D117.1 D147.4 | length 3.7
  Top Layer w0.09: D117.1@33.24,108.634 33.258,108.634 33.37,108.521 33.37,108.339 33.703,108.007 33.703,105.824 33.932,105.594 33.932,105.392 D147.4@34.066,105.258
NetD118_1: D118.1 D148.4 | length 3.7
  Top Layer w0.09: D118.1@35.79,108.644 35.91,108.523 35.91,108.339 36.243,108.007 36.243,105.834 36.482,105.594 36.482,105.402 D148.4@36.616,105.268
NetD119_1: D119.1 D149.4 | length 3.7
  Top Layer w0.09: D119.1@38.341,108.644 38.45,108.534 38.45,108.339 38.673,108.117 38.673,105.87 38.948,105.595 38.948,105.387 D149.4@39.066,105.268
NetD120_1: D120.1 D150.4 | length 3.6
  Top Layer w0.09: D120.1@-35.26,106.158 -34.98,105.878 -34.98,105.664 -34.79,105.474 -34.79,103.337 -34.568,103.114 -34.568,102.891 D150.4@-34.536,102.859
NetD121_1: D121.1 D151.4 | length 3.7
  Top Layer w0.09: D121.1@-32.81,106.143 -32.673,106.005 -32.673,105.791 -32.34,105.459 -32.34,103.409 -32.323,103.392 -32.323,103.337 -32.101,103.114 -32.101,102.901 D151.4@-31.963,102.763
NetD122_1: D122.1 D152.4 | length 3.7
  Top Layer w0.09: D122.1@-30.271,106.158 -29.991,105.878 -29.991,105.664 -29.801,105.474 -29.801,103.395 -29.797,103.392 -29.797,103.178 -29.717,103.098 -29.717,103.043 D152.4@-29.437,102.763
NetD123_1: D123.1 D153.4 | length 3.7
  Top Layer w0.09: D123.1@-27.714,106.148 -27.573,106.007 -27.573,105.781 -27.24,105.449 -27.24,103.168 -27.16,103.088 -27.16,103.033 D153.4@-26.88,102.753
NetD124_1: D124.1 D154.4 | length 3.7
  Top Layer w0.09: D124.1@-25.164,106.148 -25.023,106.007 -25.023,105.781 -24.69,105.449 -24.69,103.327 -24.468,103.104 -24.468,102.891 D154.4@-24.33,102.753
NetD125_1: D125.1 D155.4 | length 3.7
  Top Layer w0.09: D125.1@-22.624,106.108 -22.523,106.007 -22.523,105.781 -22.19,105.449 -22.19,103.327 -21.968,103.104 -21.968,102.891 D155.4@-21.791,102.713
NetD126_1: D126.1 D156.4 | length 3.7
  Top Layer w0.09: D126.1@-20.11,106.133 -19.83,105.853 -19.83,105.639 -19.64,105.449 -19.64,103.327 -19.418,103.104 -19.418,102.879 D156.4@-19.277,102.738
NetD127_1: D127.1 D157.4 | length 3.7
  Top Layer w0.09: D127.1@-17.56,106.133 -17.28,105.853 -17.28,105.639 -17.09,105.449 -17.09,103.318 -16.863,103.091 -16.863,102.874 D157.4@-16.727,102.738
NetD128_1: D128.1 D158.4 | length 3.8
  Top Layer w0.09: D128.1@-15.015,106.146 -14.873,106.004 -14.873,105.781 -14.54,105.449 -14.54,104.837 -14.571,104.806 -14.571,103.971 -14.54,103.94 -14.54,103.327 -14.318,103.104 -14.318,102.888 D158.4@-14.182,102.751
NetD129_1: D129.1 D159.4 | length 3.7
  Top Layer w0.09: D129.1@-12.491,106.149 -12.346,106.005 -12.346,105.722 -12.017,105.394 -12.017,103.328 -11.795,103.106 -11.795,102.892 D159.4@-11.657,102.754
NetD130_1: D130.1 D160.4 | length 3.7
  Top Layer w0.09: D130.1@-9.914,106.098 -9.786,105.971 -9.786,105.722 -9.454,105.39 -9.454,103.29 -9.218,103.054 -9.218,102.841 D160.4@-9.08,102.703
NetD131_1: D131.1 D161.4 | length 3.7
  Top Layer w0.09: D131.1@-7.364,106.098 -7.227,105.961 -7.227,105.722 -6.895,105.39 -6.895,103.281 -6.668,103.054 -6.668,102.841 D161.4@-6.53,102.703
NetD132_1: D132.1 D162.4 | length 3.7
  Top Layer w0.09: D132.1@-4.814,106.098 -4.668,105.952 -4.668,105.722 -4.34,105.395 -4.34,103.277 -4.118,103.054 -4.118,102.841 D162.4@-3.98,102.703
NetD133_1: D133.1 D163.4 | length 3.7
  Top Layer w0.09: D133.1@-2.314,106.137 -2.19,106.013 -2.19,105.799 -1.857,105.467 -1.857,103.334 -1.618,103.094 -1.618,102.881 D163.4@-1.48,102.743
NetD134_1: D134.1 D164.4 | length 3.7
  Top Layer w0.09: D134.1@0.208,106.155 0.35,106.013 0.35,105.799 0.67,105.479 0.67,103.334 0.893,103.112 0.893,102.898 D164.4@1.03,102.76
NetD135_1: D135.1 D165.4 | length 3.7
  Top Layer w0.09: D135.1@2.786,106.148 2.927,106.007 2.927,105.781 3.26,105.449 3.26,103.168 3.34,103.088 3.34,103.033 D165.4@3.62,102.753
NetD136_1: D136.1 D166.4 | length 3.7
  Top Layer w0.09: D136.1@5.286,106.138 5.427,105.997 5.427,105.781 5.76,105.449 5.76,103.317 5.982,103.094 5.982,102.881 D166.4@6.12,102.743
NetD137_1: D137.1 D167.4 | length 3.7
  Top Layer w0.09: D137.1@7.875,106.138 8.027,105.985 8.027,105.771 8.303,105.496 8.303,103.317 8.525,103.094 8.525,102.881 D167.4@8.663,102.743
NetD138_1: D138.1 D168.4 | length 3.7
  Top Layer w0.09: D138.1@10.435,106.138 10.527,106.045 10.527,105.831 10.86,105.499 10.86,103.158 10.94,103.078 10.94,103.023 D168.4@11.22,102.743
NetD139_1: D139.1 D169.4 | length 3.7
  Top Layer w0.09: D139.1@12.886,106.098 13.049,105.936 13.049,105.722 13.36,105.411 13.36,103.277 13.582,103.054 13.582,102.841 D169.4@13.72,102.703
NetD140_1: D140.1 D170.4 | length 3.7
  Top Layer w0.09: D140.1@15.486,106.058 15.75,105.794 15.75,105.58 15.94,105.39 15.94,103.296 16.182,103.054 16.182,102.841 D170.4@16.32,102.703
NetD141_1: D141.1 D171.4 | length 3.7
  Top Layer w0.09: D141.1@18.066,106.038 18.168,105.936 18.168,105.722 18.46,105.43 18.46,103.217 18.682,102.994 18.682,102.781 D171.4@18.82,102.643
NetD142_1: D142.1 D172.4 | length 3.7
  Top Layer w0.09: D142.1@20.536,106.098 20.677,105.957 20.677,105.722 21.009,105.39 21.009,103.277 21.232,103.054 21.232,102.841 D172.4@21.37,102.703
NetD143_1: D143.1 D173.4 | length 3.7
  Top Layer w0.09: D143.1@23.086,106.098 23.227,105.957 23.227,105.721 23.56,105.389 23.56,103.118 23.64,103.038 23.64,102.983 D173.4@23.92,102.703
NetD144_1: D144.1 D174.4 | length 3.7
  Top Layer w0.09: D144.1@25.625,106.088 25.777,105.935 25.777,105.721 26.083,105.416 26.083,103.108 26.163,103.028 26.163,102.973 D174.4@26.443,102.693
NetD145_1: D145.1 D175.4 | length 3.7
  Top Layer w0.09: D145.1@28.125,106.088 28.277,105.935 28.277,105.721 28.56,105.439 28.56,103.267 28.782,103.044 28.782,102.831 D175.4@28.92,102.693
NetD146_1: D146.1 D176.4 | length 3.7
  Top Layer w0.09: D146.1@30.686,106.088 30.827,105.947 30.827,105.721 31.16,105.389 31.16,103.267 31.382,103.044 31.382,102.831 D176.4@31.52,102.693
NetD147_1: D147.1 D177.4 | length 3.7
  Top Layer w0.09: D147.1@33.236,106.088 33.377,105.947 33.377,105.721 33.698,105.401 33.698,103.279 33.932,103.044 33.932,102.831 D177.4@34.07,102.693
NetD148_1: D148.1 D178.4 | length 3.7
  Top Layer w0.09: D148.1@35.786,106.098 35.927,105.957 35.927,105.721 36.26,105.389 36.26,103.118 36.34,103.038 36.34,102.983 D178.4@36.62,102.703
NetD149_1: D149.1 D179.4 | length 3.7
  Top Layer w0.09: D149.1@38.236,106.098 38.393,105.941 38.393,105.722 38.71,105.406 38.71,103.118 38.79,103.038 38.79,102.983 D179.4@39.07,102.703
NetD150_1: D150.1 D180.4 | length 3.7
  Top Layer w0.09: D150.1@-35.26,103.593 -34.98,103.313 -34.98,103.099 -34.79,102.909 -34.79,101.249 -34.802,101.237 -34.802,100.929 -34.79,100.917 -34.79,100.668 -34.71,100.588 -34.71,100.533 D180.4@-34.43,100.253
NetD151_1: D151.1 D181.4 | length 3.7
  Top Layer w0.09: D151.1@-32.793,103.593 -32.513,103.313 -32.513,103.099 -32.34,102.926 -32.34,100.618 -32.26,100.538 -32.26,100.483 D181.4@-31.98,100.203
NetD152_1: D152.1 D182.4 | length 3.7
  Top Layer w0.09: D152.1@-30.267,103.593 -29.991,103.316 -29.987,103.313 -29.987,103.099 -29.907,103.019 -29.907,100.732 -29.76,100.585 -29.76,100.53 D182.4@-29.48,100.25
NetD153_1: D153.1 D183.4 | length 3.7
  Top Layer w0.09: D153.1@-27.71,103.583 -27.573,103.445 -27.573,103.231 -27.35,103.009 -27.35,102.954 -27.24,102.844 -27.24,100.827 -27.018,100.604 -27.018,100.335 D183.4@-26.923,100.24
NetD154_1: D154.1 D184.4 | length 3.7
  Top Layer w0.09: D154.1@-25.16,103.583 -24.88,103.303 -24.88,103.089 -24.69,102.899 -24.69,100.777 -24.468,100.554 -24.468,100.335 D184.4@-24.373,100.24
NetD155_1: D155.1 D185.4 | length 3.7
  Top Layer w0.09: D155.1@-22.621,103.543 -22.523,103.445 -22.523,103.231 -22.19,102.899 -22.19,100.631 -22.097,100.538 -22.097,100.483 -21.833,100.219 D185.4@-21.833,100.2
NetD156_1: D156.1 D186.4 | length 3.7
  Top Layer w0.09: D156.1@-20.095,103.568 -19.973,103.445 -19.973,103.231 -19.64,102.899 -19.64,101.224 -19.652,101.212 -19.652,100.904 -19.64,100.892 -19.64,100.671 -19.557,100.588 -19.557,100.533 -19.32,100.295 D186.4@-19.32,100.225
NetD157_1: D157.1 D187.4 | length 3.7
  Top Layer w0.09: D157.1@-17.554,103.568 -17.418,103.432 -17.418,103.218 -17.196,102.996 -17.196,100.928 -16.871,100.603 -16.871,100.326 D187.4@-16.77,100.225
NetD158_1: D158.1 D188.4 | length 3.7
  Top Layer w0.09: D158.1@-15.009,103.581 -14.873,103.445 -14.873,103.231 -14.557,102.916 -14.557,100.777 -14.335,100.554 -14.335,100.349 D188.4@-14.225,100.239
NetD159_1: D159.1 D189.4 | length 3.7
  Top Layer w0.09: D159.1@-12.487,103.585 -12.35,103.447 -12.35,103.233 -12.094,102.978 -12.094,100.694 -11.937,100.537 -11.937,100.482 -11.7,100.245 D189.4@-11.7,100.242
NetD160_1: D160.1 D190.4 | length 3.7
  Top Layer w0.09: D160.1@-9.91,103.533 -9.773,103.395 -9.773,103.181 -9.44,102.849 -9.44,100.817 -9.168,100.544 -9.168,100.235 D190.4@-9.123,100.19
NetD161_1: D161.1 D191.4 | length 3.7
  Top Layer w0.09: D161.1@-7.36,103.533 -7.223,103.395 -7.223,103.181 -6.89,102.849 -6.89,100.767 -6.668,100.544 -6.668,100.285 D191.4@-6.573,100.19
NetD162_1: D162.1 D192.4 | length 3.7
  Top Layer w0.09: D162.1@-4.81,103.533 -4.673,103.395 -4.673,103.181 -4.34,102.849 -4.34,100.727 -4.118,100.504 -4.118,100.285 D192.4@-4.023,100.19
NetD163_1: D163.1 D193.4 | length 3.7
  Top Layer w0.09: D163.1@-2.31,103.573 -2.173,103.435 -2.173,103.221 -1.84,102.889 -1.84,100.832 -1.84,100.777 -1.618,100.554 -1.618,100.325 D193.4@-1.523,100.23
NetD164_1: D164.1 D194.4 | length 3.7
  Top Layer w0.09: D164.1@0.2,103.59 0.338,103.453 0.338,103.239 0.67,102.907 0.67,100.884 0.683,100.871 0.683,100.817 0.905,100.594 0.905,100.33 D194.4@0.988,100.248
NetD165_1: D165.1 D195.4 | length 3.7
  Top Layer w0.09: D165.1@2.79,103.583 2.927,103.445 2.927,103.231 3.15,103.009 3.15,100.89 3.445,100.594 3.445,100.372 D195.4@3.577,100.24
NetD166_1: D166.1 D196.4 | length 3.7
  Top Layer w0.09: D166.1@5.29,103.573 5.427,103.435 5.427,103.221 5.76,102.889 5.76,100.77 5.985,100.544 5.985,100.322 D196.4@6.077,100.23
NetD167_1: D167.1 D197.4 | length 3.7
  Top Layer w0.09: D167.1@7.833,103.573 7.97,103.435 7.97,103.221 8.303,102.889 8.303,100.784 8.532,100.554 8.532,100.318 D197.4@8.62,100.23
NetD168_1: D168.1 D198.4 | length 3.7
  Top Layer w0.09: D168.1@10.39,103.573 10.527,103.435 10.527,103.221 10.75,102.999 10.75,102.944 10.86,102.834 10.86,100.832 10.86,100.777 11.082,100.554 11.082,100.325 D198.4@11.177,100.23
NetD169_1: D169.1 D199.4 | length 3.7
  Top Layer w0.09: D169.1@12.89,103.533 13.027,103.395 13.027,103.181 13.36,102.849 13.36,100.727 13.582,100.504 13.582,100.285 D199.4@13.677,100.19
NetD170_1: D170.1 D200.4 | length 3.7
  Top Layer w0.09: D170.1@15.49,103.533 15.627,103.395 15.627,103.181 15.96,102.849 15.96,100.727 16.182,100.504 16.182,100.285 D200.4@16.277,100.19
NetD171_1: D171.1 D201.4 | length 3.7
  Top Layer w0.09: D171.1@17.99,103.473 18.127,103.335 18.127,103.121 18.46,102.789 18.46,100.68 18.685,100.454 18.685,100.222 D201.4@18.777,100.13
NetD172_1: D172.1 D202.4 | length 3.7
  Top Layer w0.09: D172.1@20.54,103.533 20.677,103.395 20.677,103.181 21.003,102.856 21.003,100.717 21.225,100.494 21.225,100.292 D202.4@21.327,100.19
NetD173_1: D173.1 D203.4 | length 3.7
  Top Layer w0.09: D173.1@23.09,103.533 23.227,103.395 23.227,103.181 23.37,103.039 23.45,102.959 23.45,102.904 23.56,102.794 23.56,100.727 23.782,100.504 23.782,100.285 D203.4@23.877,100.19
NetD174_1: D174.1 D204.4 | length 3.7
  Top Layer w0.09: D174.1@25.613,103.523 25.75,103.385 25.75,103.171 25.973,102.949 25.973,100.892 26.083,100.782 26.083,100.727 26.305,100.504 26.305,100.275 D204.4@26.4,100.18
NetD175_1: D175.1 D205.4 | length 3.7
  Top Layer w0.09: D175.1@28.09,103.523 28.227,103.385 28.227,103.171 28.56,102.839 28.56,100.727 28.782,100.504 28.782,100.275 D205.4@28.877,100.18